# Altium PCB NORA_V0.01.PcbDoc (part 3 of 3)
Units mm, origin at the board's own origin, x right, y up, seen from the top; angles counter-clockwise.
Board outline 161.42 x 170.81 mm, 2 copper layers (Top Layer, Bottom Layer), stack 1.671 mm thick; 329 components, 221 nets, 903 pads, 560 vias.
Unrouted connection lines stored in the file: 1.
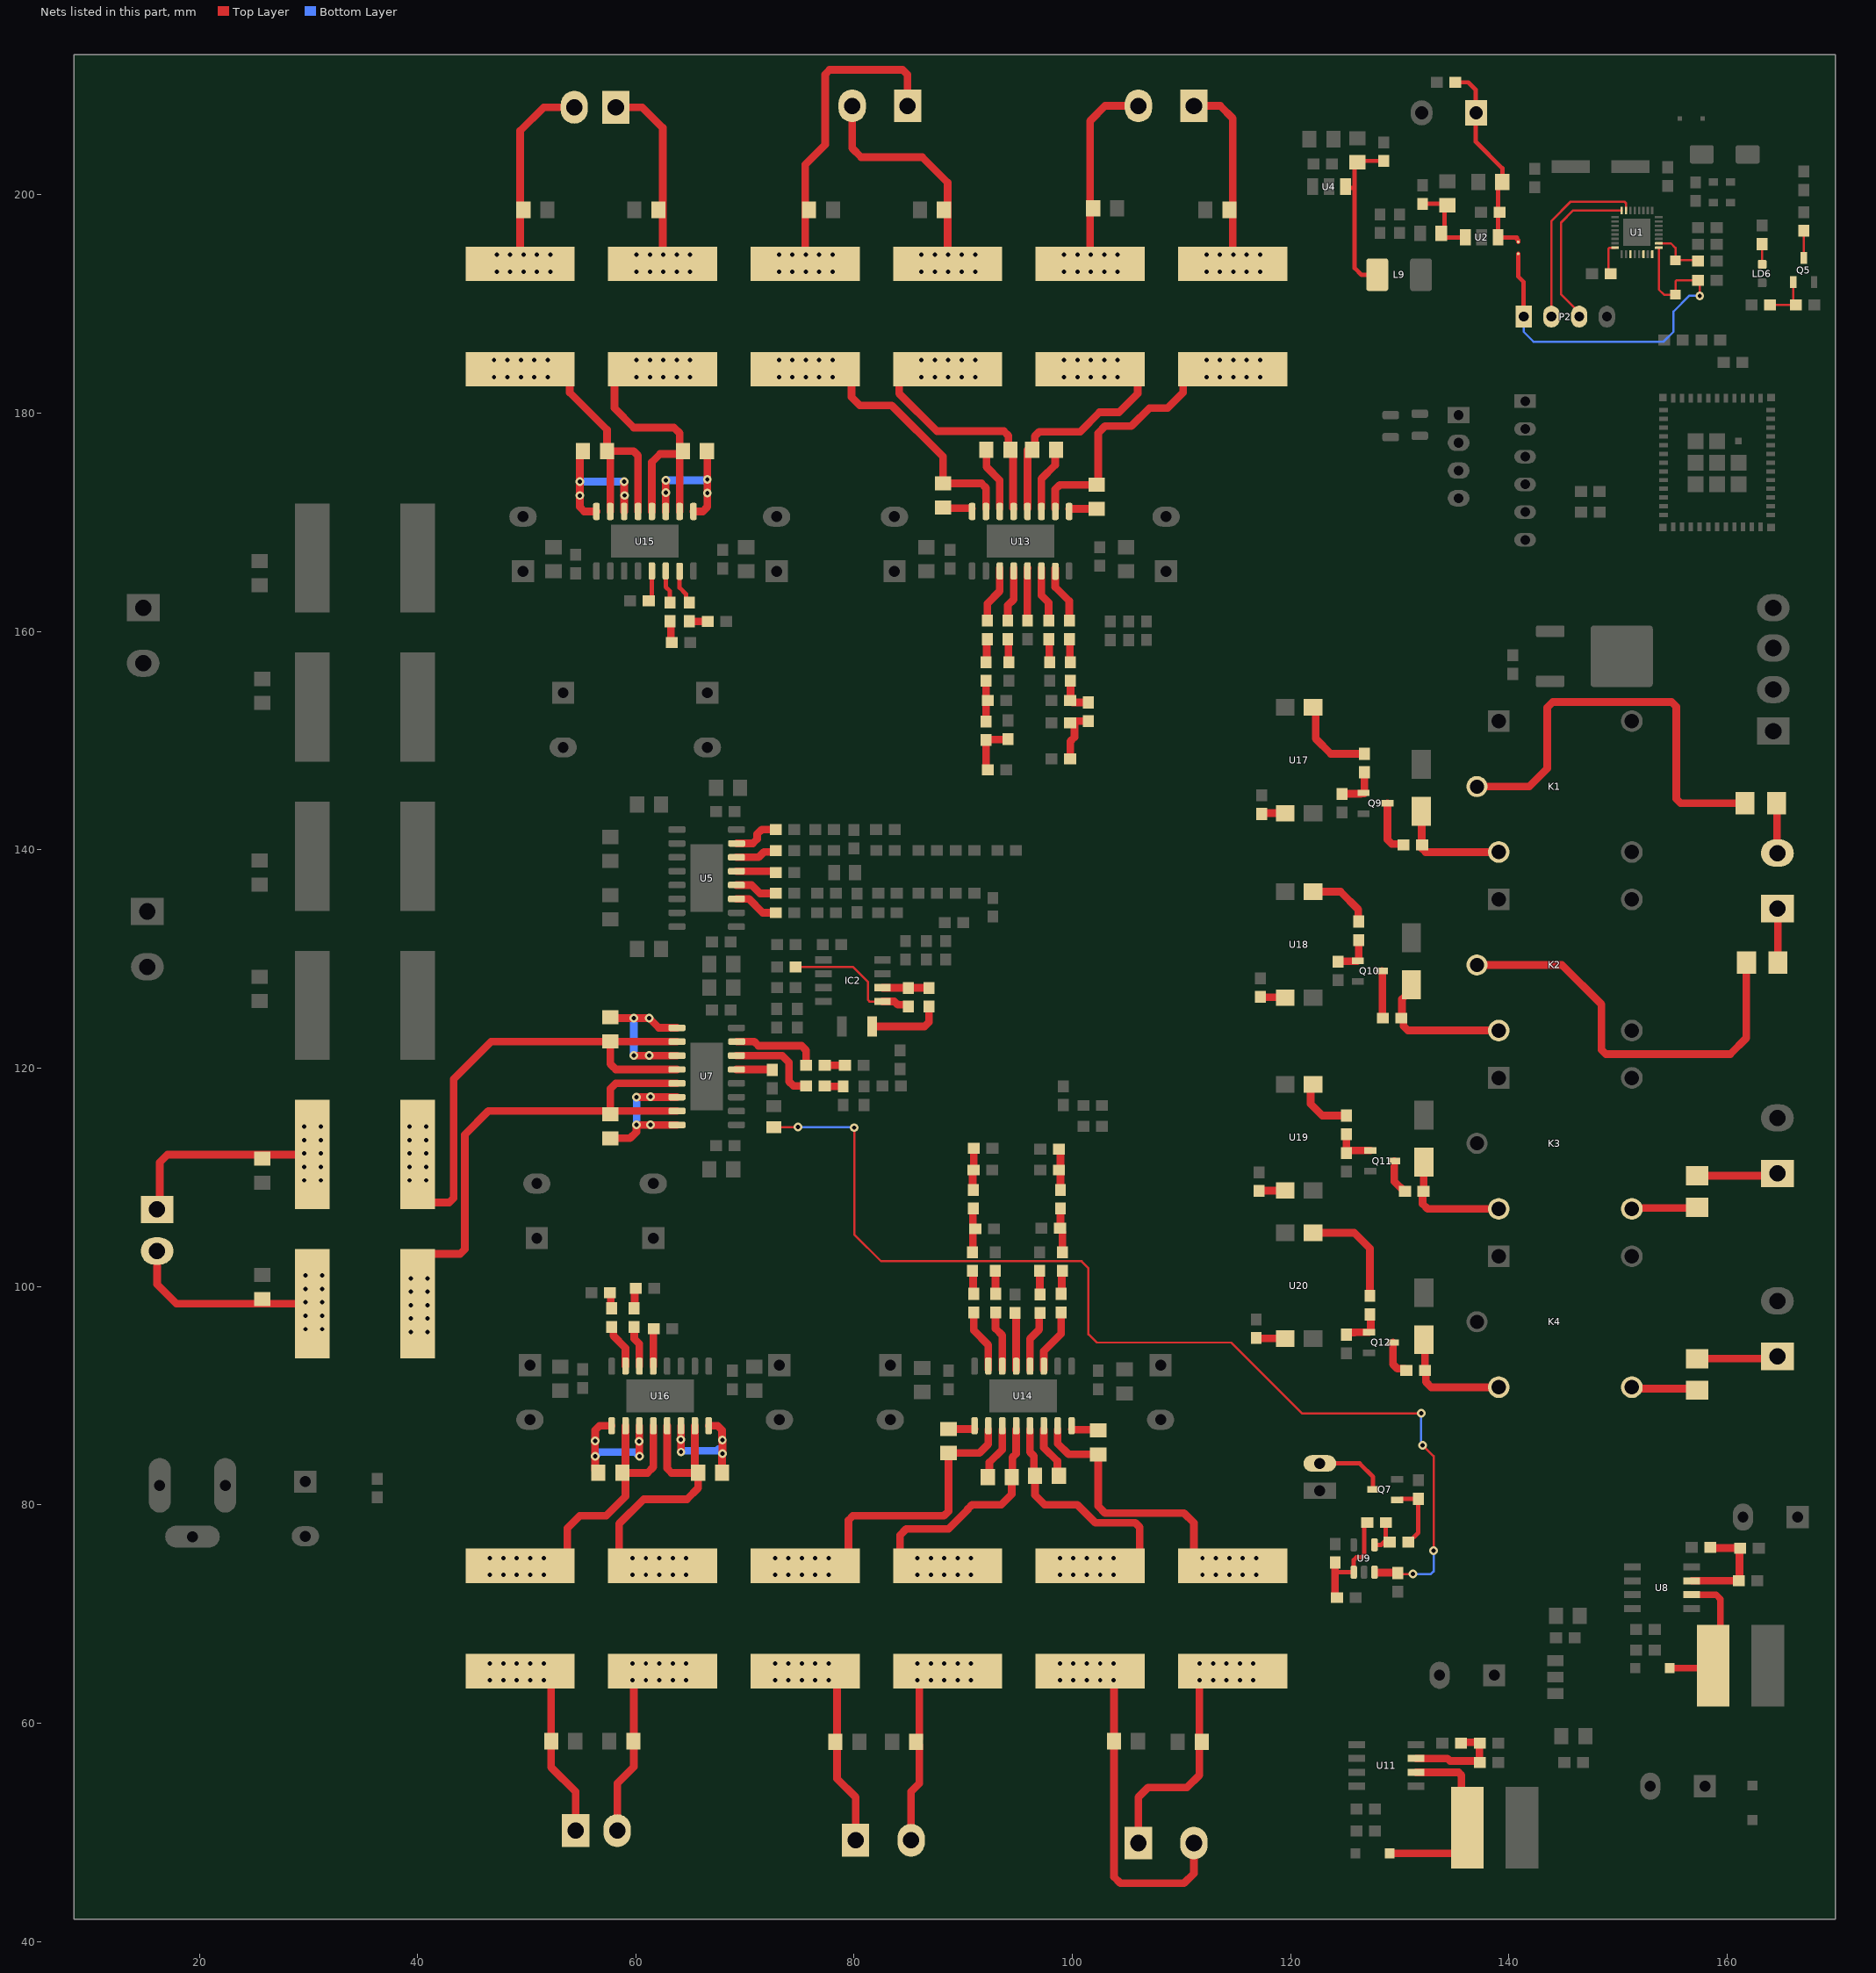
[diagram p3: the nets of this part, all layers, seen from the top]

## Via types
v1: diameter 0.8, hole 0.4, Top Layer to Bottom Layer, 560 vias

## Nets (pads, with @x,y where several pads share a name; then routed paths per layer and width w, separated by ;. In a path a pad name is that pad's centre, name@x,y a point inside that pad or via, vN(x,y) a via of type N, cw(c..) or ccw(c..) an arc to the next point about the centre after c; other vN are vias at no path point) (continued)
NetC38_1: C38.1 L4.2 U7.13 U7.15 | length 48.3
  Top Layer w0.7: L4.2@40.005,98.425 40.005,102.997 43.913,102.997 44.323,103.407 44.323,113.919 46.482,116.078 C38.1@57.658,116.078 ; U7.15@63.765,116.078 C38.1@57.658,116.078 ; U7.13@63.765,118.618 58.166,118.618 57.658,118.11 C38.1@57.658,116.078
  other v1: 39.37,95.841 40.92,95.841 39.37,97.069 40.92,97.069 39.37,98.298 40.92,98.298 39.37,99.527 40.92,99.527 39.37,100.755 40.92,100.755
NetC38_2: C38.2 U7.14 U7.16 | length 13.2
  Top Layer w0.7: C38.2@57.658,113.581 59.468,113.581 60.052,114.165 60.052,114.789 v1(60.071,114.808) U7.16@63.765,114.808 ; v1(60.071,117.348) U7.14@63.765,117.348
  Bottom Layer w0.7: v1(60.071,114.808) v1(60.071,117.348)
  other v1: 61.341,114.808 61.34,117.375
NetC39_1: C39.1 R21.1 | length 1.9
  Top Layer w0.7: R21.1@77.304,120.269 C39.1@79.16,120.269
NetC42_2: C42.2 R14.1 | length 6.8
  Top Layer w0.7: C42.2@81.661,123.825 86.458,123.825 86.868,124.235 R14.1@86.868,125.642
NetC43_1: C43.1 R22.1 | length 1.7
  Top Layer w0.7: R22.1@77.304,118.364 77.323,118.345 78.974,118.345 C43.1@78.994,118.325
NetC45_2: C45.2 U7.5 | length 3.3
  Top Layer w0.7: U7.5@69.215,119.885 72.481,119.885 C45.2@72.517,119.849
NetC47_2: C47.2 L4.1 P5.2 | length 19.4
  Top Layer w0.7: P5.2@16.129,103.251 16.129,100.203 17.907,98.425 L4.1@30.353,98.425 29.718,97.79 v1(29.718,97.323)
  other v1: 29.718,96.095 31.268,96.095 31.268,97.323 29.718,98.552 31.268,98.552 29.718,99.781 31.268,99.781 29.718,101.009 31.268,101.009
NetC48_1: C49.1 L5.1 P5.1 | length 18.7
  Top Layer w0.7: P5.1@16.129,107.061 16.383,107.315 16.383,111.379 17.093,112.089 L5.1@30.353,112.089
  other v1: 29.591,109.728 31.141,109.728 29.591,110.957 31.141,110.957 29.591,112.185 31.141,112.185 29.591,113.414 31.141,113.414 29.591,114.643 31.141,114.643
NetC50_1: C50.1 L5.2 U7.10 U7.12 | length 48.2
  Top Layer w0.7: L5.2@40.005,112.089 40.005,108.844 41.153,107.696 42.897,107.696 43.307,108.106 43.307,119.003 46.736,122.432 57.411,122.432 57.669,122.173 57.669,120.385 57.913,120.141 58.169,119.885 U7.12@63.765,119.885 ; C50.1@57.669,122.432 U7.10@63.765,122.432
  other v1: 39.243,109.728 40.793,109.728 39.243,110.957 40.793,110.957 39.243,112.185 40.793,112.185 39.243,113.414 40.793,113.414 39.243,114.643 40.793,114.643
NetC50_2: C50.2 U7.9 U7.11 | length 13.8
  Top Layer w0.7: C50.2@57.669,124.671 57.753,124.587 v1@59.79,124.587 ; v1(59.817,121.158) U7.11@63.765,121.158 ; v1(59.817,124.587) v1(61.214,124.587) 62.103,123.698 U7.9@63.765,123.698
  Bottom Layer w0.7: v1(59.817,121.158) v1(59.817,124.587)
  other v1: 61.214,121.158
NetC58_2: C58.2 U5.5 | length 3.6
  Top Layer w0.7: U5.5@69.215,138.046 72.686,138.046 C58.2@72.81,137.922
NetC90_2: C90.2 R30.2 R31.1 U8.3 | length 10.1
  Top Layer w0.7: U8.3@156.746,73.044 C90.2@161.058,73.044 161.122,73.108 161.122,75.952 R31.1@161.185,76.016 161.147,76.054 158.478,76.054 R30.2@158.44,76.092
NetC96_2: C96.2 R32.2 R33.1 U11.3 | length 9.4
  Top Layer w0.7: U11.3@131.49,56.769 134.356,56.769 134.591,56.534 137.18,56.534 R33.1@137.326,56.388 137.298,56.416 137.298,58.016 137.326,58.044 C96.2@137.326,58.166 ; R32.2@135.597,58.166 135.67,58.239 C96.2@137.197,58.239
NetC101_2: C101.2 C102.2 L9.2 U4.1 | length 15.5
  Top Layer w0.4: U4.1@125.016,200.759 125.143,200.632 125.857,200.632 ; L9.2@127.936,192.678 126.473,192.678 125.857,193.294 125.857,200.632 ; C102.2@128.524,203.112 126.234,203.112 125.857,202.735 125.857,200.632
NetC104_1: C104.1 L11.2 U13.15 | length 25.2
  Top Layer w0.7: L11.2@75.514,184.023 78.531,184.023 79.756,182.798 79.756,181.483 80.518,180.721 83.439,180.721 88.138,176.022 C104.1@88.138,173.566 91.665,173.566 92.075,173.156 U13.15@92.075,171.254
  other v1: 73.113,183.306 74.342,183.306 75.571,183.306 76.8,183.306 78.028,183.306 73.113,184.856 74.342,184.856 75.571,184.856 76.8,184.856 78.028,184.856
NetC104_2: C104.2 U13.16 | length 2.7
  Top Layer w0.7: C104.2@88.138,171.366 88.194,171.31 90.755,171.31 90.805,171.26 U13.16@90.805,171.254
NetC105_1: C105.1 L13.2 U14.15 | length 26.3
  Top Layer w0.7: U14.15@98.651,86.924 98.651,85.626 99.652,84.625 C105.1@102.362,84.625 102.362,79.883 102.997,79.248 110.236,79.248 111.125,78.359 111.125,75.647 112.35,74.422 L13.2@114.681,74.422
  other v1: 111.913,73.589 113.142,73.589 114.37,73.589 115.599,73.589 116.828,73.589 111.913,75.139 113.142,75.139 114.37,75.139 115.599,75.139 116.828,75.139
NetC105_2: C105.2 U14.16 | length 2.5
  Top Layer w0.7: U14.16@99.921,86.924 99.97,86.874 102.313,86.874 C105.2@102.362,86.825
NetC106_2: C106.2 L11.1 P7.1 | length 28.9
  Top Layer w0.7: L11.1@75.514,193.675 75.514,202.768 77.343,204.597 77.343,211.045 77.753,211.455 84.455,211.455 84.9,211.01 P7.1@84.9,208.153
  other v1: 73.113,192.958 74.342,192.958 75.571,192.958 76.8,192.958 78.028,192.958 73.113,194.508 74.342,194.508 75.571,194.508 76.8,194.508 78.028,194.508
NetC107_2: C107.2 L13.1 P8.1 | length 22.5
  Top Layer w0.7: P8.1@106.045,49.022 106.045,53.213 106.934,54.102 110.49,54.102 111.633,55.245 111.633,63.545 112.858,64.77 L13.1@114.681,64.77
  other v1: 111.659,63.937 112.888,63.937 114.116,63.937 115.345,63.937 116.574,63.937 111.659,65.487 112.888,65.487 114.116,65.487 115.345,65.487 116.574,65.487
NetC108_1: C108.1 C114.2 R60.1 | length 3.7
  Top Layer w0.7: C108.1@92.075,151.755 92.084,151.764 92.084,155.478 C114.2@92.093,155.487
NetC108_2: C108.2 R56.2 R66.1 | length 4.9
  Top Layer w0.7: R66.1@92.241,147.32 92.225,147.32 92.075,147.47 C108.2@92.075,150.055 92.124,150.104 94.058,150.104 R56.2@94.107,150.153
NetC109_1: C109.1 L14.2 U13.13 | length 24.5
  Top Layer w0.7: L14.2@88.57,184.023 85.355,184.023 84.13,182.798 84.13,181.808 87.58,178.358 93.717,178.358 94.127,177.948 94.127,177.056 94.526,176.657 94.565,176.657 94.565,171.304 U13.13@94.615,171.254
  other v1: 86.169,183.306 87.398,183.306 88.627,183.306 89.855,183.306 91.084,183.306 86.169,184.856 87.398,184.856 88.627,184.856 89.855,184.856 91.084,184.856
NetC109_2: C109.2 U13.14 | length 5.9
  Top Layer w0.7: C109.2@92.118,176.657 92.118,175.09 93.345,173.863 U13.14@93.345,171.254
NetC110_1: C116.1 L14.1 P7.2 | length 21.4
  Top Layer w0.7: P7.2@79.819,208.153 79.819,204.279 80.645,203.454 86.233,203.454 88.57,201.117 L14.1@88.57,193.675
  other v1: 86.169,192.958 87.398,192.958 88.627,192.958 89.855,192.958 91.084,192.958 86.169,194.508 87.398,194.508 88.627,194.508 89.855,194.508 91.084,194.508
NetC111_1: C111.1 C115.2 R64.1 | length 3.9
  Top Layer w0.7: R64.1@98.905,105.162 99.082,104.985 C115.2@99.082,103.141 ; R64.1@98.905,105.378 C111.1@98.905,107.156
NetC111_2: C111.2 R58.2 R69.1 | length 3.8
  Top Layer w0.7: R69.1@98.739,112.578 98.755,112.578 98.905,112.428 C111.2@98.905,108.856
NetC112_1: C112.1 L15.2 U14.13 | length 24.4
  Top Layer w0.7: U14.13@96.111,86.924 96.111,84.826 96.461,84.476 96.461,82.779 C112.1@96.563,82.677 96.563,80.899 97.452,80.01 100.457,80.01 102.108,78.359 105.762,78.359 106.172,77.949 106.172,75.647 104.947,74.422 L15.2@101.625,74.422
  other v1: 98.857,73.589 100.086,73.589 101.315,73.589 102.543,73.589 103.772,73.589 98.857,75.139 100.086,75.139 101.315,75.139 102.543,75.139 103.772,75.139
NetC112_2: C112.2 U14.14 | length 4.8
  Top Layer w0.7: U14.14@97.381,86.924 97.381,85.245 98.615,84.011 98.615,82.825 C112.2@98.763,82.677
NetC113_1: C117.1 L15.1 P8.2 | length 31
  Top Layer w0.7: L15.1@101.625,64.77 102.577,64.77 103.802,63.545 C117.1@103.802,58.349 103.802,45.931 104.394,45.339 110.236,45.339 111.125,46.228 P8.2@111.125,49.022
  other v1: 98.857,63.937 100.086,63.937 101.315,63.937 102.543,63.937 103.772,63.937 98.857,65.487 100.086,65.487 101.315,65.487 102.543,65.487 103.772,65.487
NetC114_1: C114.1 R70.1 | length 2.2
  Top Layer w0.7: C114.1@92.093,157.187 92.148,157.241 92.148,159.243 R70.1@92.202,159.297
NetC115_1: C115.1 R71.1 | length 2.2
  Top Layer w0.7: R71.1@98.973,99.326 99.027,99.381 99.027,101.387 C115.1@99.082,101.441
NetC118_1: C118.1 R72.1 | length 2.2
  Top Layer w0.7: R72.1@94.075,159.297 94.13,159.243 94.13,157.241 C118.1@94.184,157.187
NetC119_1: C119.1 R73.1 | length 2.2
  Top Layer w0.7: C119.1@97,101.441 97.014,101.427 97.014,99.289 R73.1@97.028,99.275
NetC120_2: C120.2 U13.5 | length 4.8
  Top Layer w0.7: U13.5@95.882,165.804 95.861,165.783 95.861,161.021 C120.2@95.885,160.997
NetC121_2: C121.2 U14.5 | length 5.2
  Top Layer w0.7: C121.2@94.742,97.575 94.845,97.472 94.845,92.375 U14.5@94.844,92.374
NetC122_1: C122.1 L16.2 U13.12 | length 23.7
  Top Layer w0.7: U13.12@95.882,171.254 C122.1@95.882,176.657 ; C122.1@96.309,176.657 96.55,176.898 96.55,177.898 96.96,178.308 100.711,178.308 102.489,180.086 104.267,180.086 105.989,181.808 105.989,182.945 104.911,184.023 L16.2@101.625,184.023
  other v1: 99.225,183.306 100.453,183.306 101.682,183.306 102.911,183.306 104.14,183.306 99.225,184.856 100.453,184.856 101.682,184.856 102.911,184.856 104.14,184.856
NetC122_2: C122.2 U13.11 | length 6
  Top Layer w0.7: U13.11@97.155,171.254 97.155,173.99 98.425,175.26 98.425,176.573 C122.2@98.509,176.657
NetC123_2: C123.2 L16.1 P9.2 | length 18.1
  Top Layer w0.7: L16.1@101.625,193.675 101.625,206.781 102.997,208.153 P9.2@106.045,208.153
  other v1: 99.225,192.958 100.453,192.958 101.682,192.958 102.911,192.958 104.14,192.958 99.225,194.508 100.453,194.508 101.682,194.508 102.911,194.508 104.14,194.508
NetC124_1: C124.1 L17.2 U14.12 | length 24.4
  Top Layer w0.7: L17.2@88.57,74.422 85.426,74.422 84.201,75.647 84.201,77.216 84.772,77.787 88.646,77.787 90.424,79.565 90.424,79.629 90.805,80.01 93.472,80.01 94.445,80.983 C124.1@94.445,82.55 94.494,82.599 94.494,84.349 94.844,84.699 U14.12@94.844,86.924
  other v1: 85.802,73.589 87.03,73.589 88.259,73.589 89.488,73.589 90.717,73.589 85.802,75.139 87.03,75.139 88.259,75.139 89.488,75.139 90.717,75.139
NetC124_2: C124.2 U14.11 | length 4.9
  Top Layer w0.7: C124.2@92.245,82.55 92.393,82.698 92.393,83.884 93.571,85.062 U14.11@93.571,86.924
NetC125_2: C125.2 L17.1 P10.2 | length 17.5
  Top Layer w0.7: P10.2@85.217,49.276 85.217,53.721 85.98,54.484 85.98,57.995 C125.2@85.682,58.293 ; C125.2@85.98,58.591 85.98,63.545 87.204,64.77 L17.1@88.57,64.77
  other v1: 85.802,63.937 87.03,63.937 88.259,63.937 89.488,63.937 90.717,63.937 85.802,65.487 87.03,65.487 88.259,65.487 89.488,65.487 90.717,65.487
NetC126_1: C126.1 R74.1 | length 2.1
  Top Layer w0.7: R74.1@97.822,159.297 97.869,159.25 97.869,157.235 C126.1@97.917,157.187
NetC127_1: C127.1 R75.1 | length 2.1
  Top Layer w0.7: C127.1@92.936,101.441 92.945,101.432 92.945,99.335 R75.1@92.954,99.326
NetC128_1: C128.1 C132.1 R81.1 | length 3.5
  Top Layer w0.7: C132.1@99.822,155.487 99.822,153.67 99.833,153.67 99.999,153.504 C128.1@101.473,153.504
NetC128_2: C128.2 R76.1 R80.1 | length 5.4
  Top Layer w0.7: R76.1@99.783,148.336 99.783,148.466 99.802,148.486 99.802,149.955 100.183,150.335 100.183,151.521 R80.1@100.183,151.804 ; R80.1@99.783,151.638 99.933,151.788 100.167,151.788 R80.1@100.183,151.804 ; C128.2@101.473,151.804 R80.1@100.183,151.804
NetC129_1: C134.1 L18.1 P9.1 | length 17.4
  Top Layer w0.7: P9.1@111.125,208.153 113.538,208.153 114.681,207.01 L18.1@114.681,193.675
  other v1: 112.28,192.958 113.509,192.958 114.738,192.958 115.966,192.958 117.195,192.958 112.28,194.508 113.509,194.508 114.738,194.508 115.966,194.508 117.195,194.508
NetC130_1: C130.1 C133.1 R83.1 | length 4.3
  Top Layer w0.7: C133.1@90.845,103.141 90.874,103.17 R83.1@90.874,105.457 ; C130.1@90.904,107.156 90.904,106.985 90.874,106.956 R83.1@90.874,105.457 ; R83.1@91.098,105.283 91.048,105.283 R83.1@90.874,105.457
NetC130_2: C130.2 R77.1 R82.1 | length 3.9
  Top Layer w0.7: C130.2@90.904,108.856 90.86,108.9 90.86,110.673 90.957,110.77 90.957,112.635 R77.1@90.971,112.649
NetC131_1: C135.1 L19.1 P10.1 | length 18.5
  Top Layer w0.7: L19.1@75.514,64.77 77.208,64.77 78.433,63.545 78.433,58.451 C135.1@78.275,58.293 78.433,58.135 78.433,54.917 80.137,53.213 P10.1@80.137,49.276
  other v1: 72.746,63.937 73.975,63.937 75.203,63.937 76.432,63.937 77.661,63.937 72.746,65.487 73.975,65.487 75.203,65.487 76.432,65.487 77.661,65.487
NetC132_2: C132.2 R78.1 | length 2.2
  Top Layer w0.7: R78.1@99.713,159.297 99.768,159.243 99.768,157.241 C132.2@99.822,157.187
NetC133_2: C133.2 R79.1 | length 2.2
  Top Layer w0.7: C133.2@90.845,101.441 90.899,101.387 90.899,99.381 R79.1@90.954,99.326
NetC136_1: C136.1 L18.2 U13.10 | length 25.8
  Top Layer w0.7: U13.10@98.429,171.254 98.429,173.029 98.839,173.439 C136.1@102.235,173.439 102.363,173.567 102.363,178.182 102.997,178.816 105.41,178.816 107.061,180.467 108.712,180.467 110.145,181.9 110.145,182.798 111.369,184.023 L18.2@114.681,184.023
  other v1: 112.28,183.306 113.509,183.306 114.738,183.306 115.966,183.306 117.195,183.306 112.28,184.856 113.509,184.856 114.738,184.856 115.966,184.856 117.195,184.856
NetC136_2: C136.2 U13.9 | length 2.5
  Top Layer w0.7: U13.9@99.695,171.254 99.703,171.247 102.227,171.247 C136.2@102.235,171.239
NetC137_1: C137.1 L19.2 U14.10 | length 27.6
  Top Layer w0.7: L19.2@75.514,74.422 78.248,74.422 79.473,75.647 79.473,78.584 79.883,78.994 88.236,78.994 88.646,79.404 C137.1@88.646,84.752 91.483,84.752 92.297,85.566 U14.10@92.297,86.924
  other v1: 72.746,73.589 73.975,73.589 75.203,73.589 76.432,73.589 77.661,73.589 72.746,75.139 73.975,75.139 75.203,75.139 76.432,75.139 77.661,75.139
NetC137_2: C137.2 U14.9 | length 2.4
  Top Layer w0.7: C137.2@88.646,86.952 88.66,86.938 91.017,86.938 U14.9@91.031,86.924
NetC151_1: C151.1 L20.2 U15.13 U15.15 | length 26.2
  Top Layer w0.7: L20.2@49.403,184.023 52.715,184.023 53.939,182.798 53.939,181.9 57.361,178.478 C151.1@57.361,176.53 59.788,176.53 60.198,176.12 U15.13@60.198,171 ; U15.15@57.658,171 C151.1@57.658,176.36
  other v1: 47.002,183.306 48.231,183.306 49.46,183.306 50.688,183.306 51.917,183.306 47.002,184.856 48.231,184.856 49.46,184.856 50.688,184.856 51.917,184.856
NetC151_2: C151.2 U15.14 U15.16 | length 13.9
  Top Layer w0.7: C151.2@55.161,176.657 54.864,176.36 54.864,171.41 55.274,171 U15.16@56.388,171 ; U15.14@58.928,171 v1(58.928,173.736)
  Bottom Layer w0.7: v1(54.864,173.736) v1(58.928,173.736)
  other v1: 54.864,172.466 58.955,172.467
NetC152_1: C152.1 L21.2 U16.13 U16.15 | length 28.5
  Top Layer w0.7: L21.2@62.459,74.422 59.681,74.422 58.456,75.647 58.456,78.268 60.706,80.518 64.686,80.518 65.702,81.534 C152.1@65.702,82.931 ; U16.13@62.865,87.249 62.865,83.341 63.275,82.931 C152.1@65.702,82.931 ; U16.15@65.405,87.249 65.405,83.228 C152.1@65.702,82.931
  other v1: 59.69,73.589 60.919,73.589 62.148,73.589 63.377,73.589 64.605,73.589 59.69,75.139 60.919,75.139 62.148,75.139 63.377,75.139 64.605,75.139
NetC152_2: C152.2 U16.14 U16.16 | length 11.8
  Top Layer w0.7: v1(64.135,84.836) U16.14@64.135,87.249 ; U16.16@66.675,87.249 67.492,87.249 67.902,86.839 67.902,85.938 67.931,85.908 67.931,84.723 v1(67.945,84.709) 67.945,84.682 67.902,84.639 C152.2@67.902,82.931
  Bottom Layer w0.7: v1(64.135,84.836) 64.262,84.963 67.437,84.963 67.564,85.09 v1(67.945,84.709)
  other v1: 67.918,85.938 64.108,85.978
NetC153_2: C153.2 L20.1 P11.2 | length 18
  Top Layer w0.7: L20.1@49.403,193.675 49.403,205.867 51.562,208.026 P11.2@54.356,208.026
  other v1: 47.256,192.958 48.485,192.958 49.714,192.958 50.942,192.958 52.171,192.958 47.256,194.508 48.485,194.508 49.714,194.508 50.942,194.508 52.171,194.508
NetC154_2: C154.2 L21.1 P12.2 | length 17.2
  Top Layer w0.7: P12.2@58.293,50.165 58.293,54.483 59.817,56.007 59.817,63.545 61.042,64.77 L21.1@62.459,64.77
  other v1: 59.69,63.937 60.919,63.937 62.148,63.937 63.377,63.937 64.605,63.937 59.69,65.487 60.919,65.487 62.148,65.487 63.377,65.487 64.605,65.487
NetC155_2: C155.2 U15.5 | length 2.9
  Top Layer w0.4: C155.2@61.175,162.814 61.465,163.104 U15.5@61.465,165.55
NetC156_1: C159.1 L22.1 P11.1 | length 17.9
  Top Layer w0.7: P11.1@58.166,208.026 60.579,208.026 62.459,206.146 C159.1@62.459,198.628 ; C159.1@62.06,198.628 C159.1@62.459,198.628 ; L22.1@62.459,193.675 C159.1@62.459,198.628
  other v1: 60.058,192.958 61.287,192.958 62.515,192.958 63.744,192.958 64.973,192.958 60.058,194.508 61.287,194.508 62.515,194.508 63.744,194.508 64.973,194.508
NetC157_2: C157.2 U16.5 | length 3.4
  Top Layer w0.7: U16.5@61.598,92.699 C157.2@61.598,96.103
NetC158_1: C160.1 L23.1 P12.1 | length 17.7
  Top Layer w0.7: L23.1@49.403,64.77 51.015,64.77 52.24,63.545 C160.1@52.24,58.349 52.24,55.964 54.483,53.721 P12.1@54.483,50.165
  other v1: 46.635,63.937 47.864,63.937 49.092,63.937 50.321,63.937 51.55,63.937 46.635,65.487 47.864,65.487 49.092,65.487 50.321,65.487 51.55,65.487
NetC161_1: C161.1 R84.1 | length 2
  Top Layer w0.7: R84.1@63.119,160.948 63.202,160.865 63.202,159.087 C161.1@63.285,159.004
NetC162_1: C162.1 R85.1 | length 1.9
  Top Layer w0.7: R85.1@59.817,98.005 59.9,98.088 59.9,99.739 C162.1@59.983,99.822
NetC163_1: C163.1 R86.1 | length 1.7
  Top Layer w0.7: R86.1@64.897,160.948 64.917,160.929 66.567,160.929 C163.1@66.587,160.909
NetC164_1: C164.1 R87.1 | length 1.5
  Top Layer w0.7: C164.1@57.619,99.441 57.702,99.358 57.702,98.088 R87.1@57.785,98.005
NetC165_1: C165.1 L22.2 U15.10 U15.12 | length 28.6
  Top Layer w0.7: U15.12@61.465,171 61.465,175.511 62.23,176.276 64.051,176.276 C165.1@64.305,176.53 64.007,176.828 64.007,178.182 63.5,178.689 59.817,178.689 58.039,180.467 58.039,182.798 59.264,184.023 L22.2@62.459,184.023 ; U15.10@64.012,171 C165.1@64.012,175.833
  other v1: 60.058,183.306 61.287,183.306 62.515,183.306 63.744,183.306 64.973,183.306 60.058,184.856 61.287,184.856 62.515,184.856 63.744,184.856 64.973,184.856
NetC165_2: C165.2 U15.9 U15.11 | length 13.3
  Top Layer w0.7: U15.11@62.738,171 v1(62.738,173.863) ; U15.9@65.278,171 66.138,171 66.548,171.41 v1(66.548,173.949) 66.548,176.487 C165.2@66.505,176.53
  Bottom Layer w0.7: v1(62.738,173.863) 66.435,173.863 66.521,173.949 v1(66.548,173.949)
  other v1: 66.548,172.679 62.738,172.72
NetC166_1: C166.1 L23.2 U16.10 U16.12 | length 26.6
  Top Layer w0.7: L23.2@49.403,74.422 52.496,74.422 53.721,75.647 53.721,77.851 54.864,78.994 57.277,78.994 59.055,80.772 C166.1@59.055,82.931 ; U16.10@59.051,87.249 59.051,82.935 C166.1@59.056,82.931 ; U16.12@61.598,87.249 61.598,83.468 61.061,82.931 C166.1@59.056,82.931
  other v1: 46.635,73.589 47.864,73.589 49.092,73.589 50.321,73.589 51.55,73.589 46.635,75.139 47.864,75.139 49.092,75.139 50.321,75.139 51.55,75.139
NetC166_2: C166.2 U16.9 U16.11 | length 12.9
  Top Layer w0.7: C166.2@56.558,82.931 56.28,83.209 56.28,84.436 v1(56.261,84.455) v1(56.261,85.852) 56.273,85.864 56.273,86.839 56.683,87.249 U16.9@57.785,87.249 ; v1(60.325,84.455) U16.11@60.325,87.249
  Bottom Layer w0.7: v1(56.261,84.455) 56.642,84.836 59.944,84.836 v1(60.325,84.455)
  other v1: 60.298,85.811
NetD2_1: D2.1 L8.2 U8.2 | length 13.3
  Top Layer w0.6: D2.1@154.72,65.043 158.468,65.043 L8.2@158.703,65.278 159.385,65.96 159.385,71.374 158.985,71.774 U8.2@156.746,71.774
NetD4_1: D4.1 L10.2 U11.2 | length 18.1
  Top Layer w0.7: D4.1@129.073,48.082 135.034,48.082 136.184,49.232 L10.2@136.184,50.419 135.635,50.968 135.635,55.246 135.382,55.499 U11.2@131.49,55.499
NetD5_A: D5.A K1.A2 R88.2 | length 10.4
  Top Layer w0.7: R88.2@131.953,140.209 132.363,139.799 K1.A2@139.061,139.799 ; D5.A@131.953,143.519 131.997,143.475 131.997,140.506 R88.2@132.041,140.462
NetD6_A: D6.A K2.A2 R92.2 | length 13.2
  Top Layer w0.7: D6.A@131.064,127.644 131.064,127.194 130.186,126.316 R92.2@130.186,124.587 ; K2.A2@139.061,123.457 130.746,123.457 130.336,123.867 130.336,124.437 R92.2@130.186,124.587 ; R92.2@130.186,124.587 R92.2@130.136,124.587 R92.2@130.186,124.587
NetD7_A: D7.A K3.A2 R96.2 | length 10.9
  Top Layer w0.7: D7.A@132.188,111.28 132.188,108.731 132.077,108.621 132.077,107.572 132.533,107.116 K3.A2@139.061,107.116
NetD8_A: D8.A K4.A2 R100.2 | length 10.8
  Top Layer w0.7: D8.A@132.207,95.132 132.311,95.028 R100.2@132.311,92.329 ; R100.2@132.295,92.329 132.374,92.25 132.374,91.273 132.873,90.774 K4.A2@139.061,90.774
NetIC2_1: IC2.1 R10.2 R17.1 | length 12.8
  Top Layer w0.2: R10.2@74.637,129.286 75.565,129.286 79.883,129.286 81.28,127.889 81.28,126.238 81.407,126.111 IC2.1@82.595,126.111
  Top Layer w0.7: IC2.1@82.595,126.111 83.693,126.111 83.995,125.809 84.813,125.809 84.963,125.659 R17.1@84.963,125.642
NetIC2_2: IC2.2 R14.2 R17.2 | length 4.3
  Top Layer w0.7: IC2.2@82.595,127.381 82.614,127.362 86.849,127.362 R14.2@86.868,127.342
NetJ7_1: J7.1 L25.1 | length 5
  Top Layer w0.7: J7.1@164.592,134.62 164.64,134.572 L25.1@164.64,129.667
NetJ7_2: J7.2 L24.1 | length 4.6
  Top Layer w0.7: L24.1@164.513,144.272 164.553,144.233 164.553,139.739 J7.2@164.592,139.7
NetJ8_1: J8.1 L26.1 | length 7.5
  Top Layer w0.7: L26.1@157.226,110.157 164.386,110.157 J8.1@164.592,110.363
NetJ9_1: J9.1 L27.1 | length 7.5
  Top Layer w0.7: L27.1@157.226,93.393 164.386,93.393 J9.1@164.592,93.599
NetK1_COM: K1.COM L24.2 | length 39.8
  Top Layer w0.7: K1.COM@137.061,145.799 141.862,145.799 143.51,147.447 143.51,153.035 144.018,153.543 154.911,153.543 155.321,153.133 155.321,144.682 155.731,144.272 L24.2@161.623,144.272
NetK2_COM: K2.COM L25.2 | length 38
  Top Layer w0.7: K2.COM@137.061,129.457 144.863,129.457 148.463,125.857 148.463,121.695 148.873,121.285 160.274,121.285 161.75,122.761 L25.2@161.75,129.667
NetK3_NO: K3.NO L26.2 | length 6
  Top Layer w0.7: K3.NO@151.261,107.116 151.337,107.191 157.15,107.191 L26.2@157.226,107.267
NetK4_NO: K4.NO L27.2 | length 6.1
  Top Layer w0.7: K4.NO@151.261,90.774 151.397,90.638 157.09,90.638 L27.2@157.226,90.503
NetLD6_2: LD6.2 R65.2 | length 1.9
  Top Layer w0.2: LD6.2@163.195,193.636 R65.2@163.195,195.492
NetQ5_1: Q5.1 R40.1 R46.1 | length 4.5
  Top Layer w0.2: R40.1@163.918,189.938 R46.1@166.282,189.938 166.055,190.165 Q5.1@166.055,192.013
NetQ5_3: Q5.3 R37.1 | length 2.5
  Top Layer w0.2: Q5.3@167.005,194.213 R37.1@167.005,196.708
NetQ7_1: Q7.1 R20.2 R63.1 | length 6.4
  Top Layer w0.4: Q7.1@129.751,80.457 130.001,80.457 130.101,80.557 130.335,80.557 R63.1@131.699,80.557 131.682,80.54 131.682,77.442 130.821,76.581 R20.2@130.771,76.581
NetQ7_3: Q7.3 U6.2 | length 6.6
  Top Layer w0.4: U6.2@122.665,83.799 126.313,83.799 127.551,82.561 Q7.3@127.551,81.407
NetQ9_1: Q9.1 R90.2 R91.2 | length 6
  Top Layer w0.7: R91.2@124.691,145.099 124.764,145.172 Q9.1@126.612,145.172 ; R91.2@124.714,145.172 R91.2@124.714,145.122 126.412,145.122 126.462,145.172 Q9.1@126.612,145.172 ; Q9.1@126.746,145.161 R90.2@126.746,147.105 ; Q9.1@126.612,145.172 Q9.1@126.662,145.222 Q9.1@126.612,145.172
NetQ9_3: Q9.3 R88.1 | length 5
  Top Layer w0.7: Q9.3@128.862,144.272 128.862,140.938 129.272,140.528 130.275,140.528 R88.1@130.341,140.462
NetQ10_1: Q10.1 R94.2 R95.2 | length 3.9
  Top Layer w0.7: R95.2@124.333,129.755 124.333,129.805 Q10.1@126.104,129.805 ; Q10.1@126.154,129.855 Q10.1@126.104,129.805 ; R94.2@126.238,131.738 126.238,129.905 126.204,129.905 Q10.1@126.104,129.805
NetQ10_3: Q10.3 R92.1 | length 4.4
  Top Layer w0.7: Q10.3@128.354,128.905 128.404,128.855 128.404,124.619 R92.1@128.436,124.587
NetQ11_1: Q11.1 R98.2 R99.2 | length 4.1
  Top Layer w0.7: R98.2@125.095,113.958 R99.2@125.095,112.229 125.095,112.279 125.272,112.456 Q11.1@127.297,112.456
NetQ11_3: Q11.3 R96.1 | length 3.2
  Top Layer w0.7: Q11.3@129.497,111.506 129.497,109.633 130.418,108.712 R96.1@130.468,108.712
NetQ12_1: Q12.1 R102.2 R103.2 | length 4.3
  Top Layer w0.7: R103.2@125.095,95.592 125.095,95.642 125.245,95.792 125.852,95.792 ; R103.2@125.57,95.819 Q12.1@127.17,95.819 127.22,95.869 127.338,95.869 127.338,97.278 127.254,97.362 R102.2@127.254,97.448
NetQ12_3: Q12.3 R100.1 | length 3.4
  Top Layer w0.7: Q12.3@129.37,94.869 129.37,92.889 129.78,92.479 130.445,92.479 R100.1@130.595,92.329
NetR16_1: R16.1 R51.2 R67.1 U9.1 | length 10.3
  Top Layer w0.4: 124.062,73.787 124.105,73.83 U9.1@125.777,73.83 125.777,74.95 126.011,75.184 126.492,75.184 126.746,75.438 126.746,78.102 R67.1@127.022,78.378
  Top Layer w0.7: R51.2@124.079,71.501 124.062,71.518 124.062,73.787 124.062,74.515 124.079,74.532 R16.1@124.079,74.715
NetR20_1: R20.1 R67.2 U9.4 | length 3.3
  Top Layer w0.4: U9.4@127.677,76.34 128.29,76.34 R20.1@128.722,76.773 ; R67.2@128.722,78.378 R20.1@128.722,76.773 ; R20.1@129.071,76.581 128.879,76.773 R20.1@128.722,76.773
NetR21_2: R21.2 U7.7 | length 8.1
  Top Layer w0.7: U7.7@69.236,122.432 70.861,122.432 71.24,122.052 75.194,122.052 75.604,121.642 R21.2@75.604,120.269
NetR22_2: R22.2 U7.6 | length 8.6
  Top Layer w0.7: U7.6@69.215,121.158 73.406,121.158 74.041,120.523 74.041,118.774 74.451,118.364 R22.2@75.604,118.364
NetR53_2: R53.2 U5.7 | length 4.3
  Top Layer w0.7: U5.7@69.236,140.593 70.71,140.593 71.12,141.003 71.12,141.449 71.53,141.859 72.732,141.859 R53.2@72.737,141.854
NetR54_2: R54.2 U5.6 | length 3.8
  Top Layer w0.7: U5.6@69.215,139.319 71.247,139.319 71.74,139.812 72.6,139.812 R54.2@72.737,139.949
NetR59_2: R59.2 U5.3 | length 4.1
  Top Layer w0.7: U5.3@69.215,135.509 70.358,135.509 71.628,134.239 R59.2@72.81,134.239
NetR61_2: R61.2 U5.4 | length 3.9
  Top Layer w0.7: U5.4@69.215,136.779 70.612,136.779 71.374,136.017 R61.2@72.81,136.017
NetR62_1: R62.1 R68.2 U9.3 | length 99.9
  Top Layer w0.2: R68.2@72.644,114.608 v1(74.857,114.608) ; v1(80.01,114.554) 80.01,104.775 82.474,102.311 100.838,102.311 101.473,101.676 101.473,95.631 102.235,94.869 114.554,94.869 121.031,88.392 v1(131.953,88.392) ; R62.1@129.753,73.789 R62.1@129.794,73.748 129.882,73.66 v1(131.191,73.66) ; v1(132.08,85.471) 133.096,84.455 v1(133.096,75.819)
  Top Layer w0.7: U9.3@127.718,73.789 R62.1@129.753,73.789
  Bottom Layer w0.2: v1(74.857,114.608) 74.883,114.581 79.983,114.581 v1(80.01,114.554) ; v1(131.191,73.66) 132.842,73.66 133.096,73.914 v1(133.096,75.819) ; v1(131.953,88.392) 131.953,85.598 v1(132.08,85.471)
NetR70_2: R70.2 U13.3 | length 5.3
  Top Layer w0.7: R70.2@92.202,160.997 92.202,162.56 93.345,163.703 U13.3@93.345,165.804
NetR71_2: R71.2 U14.3 | length 5.9
  Top Layer w0.7: U14.3@97.381,92.374 97.381,94.079 98.973,95.671 R71.2@98.973,97.626
NetR72_2: R72.2 U13.4 | length 5
  Top Layer w0.7: R72.2@94.075,160.997 94.075,162.401 94.615,162.941 U13.4@94.615,165.804
NetR73_2: R73.2 U14.4 | length 5.6
  Top Layer w0.7: U14.4@96.111,92.374 96.111,95.222 96.955,96.066 96.955,97.502 R73.2@97.028,97.575
NetR74_2: R74.2 U13.6 | length 5.1
  Top Layer w0.7: U13.6@97.155,165.804 97.155,163.322 97.822,162.655 R74.2@97.822,160.997
NetR75_2: R75.2 U14.6 | length 5.5
  Top Layer w0.7: R75.2@92.954,97.626 92.954,96.149 93.571,95.532 U14.6@93.571,92.374
NetR78_2: R78.2 U13.7 | length 5.3
  Top Layer w0.7: U13.7@98.429,165.783 98.429,164.08 99.713,162.796 R78.2@99.713,160.997
NetR79_2: R79.2 U14.7 | length 5.8
  Top Layer w0.7: R79.2@90.954,97.626 90.954,95.99 92.297,94.647 U14.7@92.297,92.395
NetR84_2: R84.2 U15.6 | length 3.1
  Top Layer w0.4: U15.6@62.738,165.55 62.738,164.084 63.119,163.703 R84.2@63.119,162.648
NetR85_2: R85.2 U16.6 | length 3.8
  Top Layer w0.7: R85.2@59.817,96.305 59.857,96.265 59.857,95.21 60.325,94.742 U16.6@60.325,92.699
NetR86_2: R86.2 U15.7 | length 3.1
  Top Layer w0.4: U15.7@64.012,165.529 64.012,164.011 64.597,163.425 64.597,162.998 64.797,162.798 R86.2@64.824,162.798
NetR87_2: R87.2 U16.7 | length 4.1
  Top Layer w0.7: R87.2@57.785,96.305 57.935,96.155 57.935,95.481 59.051,94.365 U16.7@59.051,92.72
NetR89_2: R89.2 U17.1 | length 2.2
  Top Layer w0.7: R89.2@117.348,143.295 117.386,143.256 117.501,143.371 119.495,143.371 U17.1@119.507,143.359
NetR90_1: R90.1 U17.3 | length 8
  Top Layer w0.7: U17.3@122.047,153.059 122.301,152.805 122.301,150.179 123.675,148.805 R90.1@126.746,148.805
NetR93_2: R93.2 U18.1 | length 2.2
  Top Layer w0.7: R93.2@117.221,126.531 117.252,126.499 119.349,126.499 U18.1@119.38,126.468
NetR94_1: R94.1 U18.3 | length 6.1
  Top Layer w0.7: U18.3@121.92,136.168 124.563,136.168 126.198,134.533 126.198,133.478 R94.1@126.238,133.438
NetR97_2: R97.2 U19.1 | length 2.2
  Top Layer w0.7: R97.2@117.094,108.751 117.126,108.783 119.221,108.783 U19.1@119.253,108.815
NetR98_1: R98.1 U19.3 | length 5.5
  Top Layer w0.7: U19.3@121.793,118.515 121.831,118.477 121.831,116.715 122.889,115.658 R98.1@125.095,115.658
NetR101_2: R101.2 U20.1 | length 2.4
  Top Layer w0.7: R101.2@116.84,95.289 116.871,95.257 119.222,95.257 U20.1@119.253,95.226
NetR102_1: R102.1 U20.3 | length 10.4
  Top Layer w0.7: U20.3@121.793,104.926 125.833,104.926 127.254,103.505 R102.1@127.254,99.148
SD_CLK: U1.6
SD_DAT: U1.8
SD_PG: U1.3
USBDM: P2.2 U1.23 | length 17
  Top Layer w0.22: P2.2@143.891,188.849 143.891,197.612 145.65,199.371 150.592,199.371 150.721,199.242 U1.23@150.721,198.574
USBDP: P2.3 U1.24 | length 15.3
  Top Layer w0.22: P2.3@146.431,188.849 146.431,189.195 146.078,189.549 146.078,189.583 144.78,190.881 144.78,197.485 145.869,198.574 U1.24@150.321,198.574
VBAT: C51.1 D3.2 U1.10 | length 4.9
  Top Layer w0.2: U1.10@153.726,195.569 154.824,195.569 155.25,195.143 D3.2@155.25,194.007 157.27,194.007 C51.1@157.321,193.956
VCM: C29.1 U1.32 | length 3
  Top Layer w0.2: C29.1@149.313,192.786 149.098,193.001 149.098,195.042 149.215,195.159 149.706,195.159 U1.32@149.716,195.169
Vin-P: C98.2 C99.2 L12.1 U2.3 | length 6.8
  Top Layer w0.4: C98.2@132.08,199.175 134.243,199.175 C99.2@134.366,199.052 134.112,198.798 L12.1@134.112,197.064 ; L12.1@133.787,196.488 133.787,196.457 134.138,196.107 U2.3@136,196.107
Vout: C74.2 C94.2 C95.2 C142.1 SB1.1 U2.1 | length 19.1
  Top Layer w0.4: C74.2@135.089,210.312 136.271,210.312 136.953,209.63 136.953,207.558 C142.1@136.993,207.518 136.953,207.478 136.953,204.874 139.389,202.438 139.389,201.19 C94.2@139.386,201.187 139,200.801 139,198.393 U2.1@139,196.107 140.743,196.107 140.743,195.953 140.843,195.853 SB1.1@140.843,195.699
VPWR: C44.1 D3.1 P2.1 SB1.2 U1.9 | length 37.3
  Top Layer w0.2: U1.9@153.726,195.169 153.726,191.333 154.202,190.857 D3.1@155.25,190.857 155.25,192.061 155.367,192.178 C44.1@156.972,192.178 ; C44.1@157.321,192.178 C44.1@156.972,192.178 ; v1(157.48,190.754) 157.48,191.778 157.08,192.178 C44.1@156.972,192.178
  Top Layer w0.4: SB1.2@140.843,194.599 140.843,192.532 141.351,192.024 P2.1@141.351,188.849
  Bottom Layer w0.2: P2.1@141.351,188.849 141.351,187.452 142.24,186.563 154.178,186.563 155.067,187.452 155.067,189.313 156.508,190.754 v1(157.48,190.754)
pads on no net: A2.1 K3.NC K4.NC L9.0 LD6.0 T1.0 U3.4 U3.7 U3.9 U3.10 U3.15 U3.17 U3.24 U3.25 U3.28 U3.29 U3.32 U3.33 U3.34 U3.35

## Polygon pours and split planes (outlines as drawn)
GND on Bottom Layer "NONET_L02_P003" (solid, remove dead copper, shelved, pour order 3): 8.509,42.037 8.509,212.852 169.926,212.852 169.926,42.037
GND on Top Layer "NONET_L01_P002" (solid, remove dead copper, shelved, pour order 2): 8.509,42.037 8.509,212.852 169.926,212.852 169.926,42.037

## Keep-outs
Keep-Out Layer:
  lines w0.2: 8.509,42.037 169.926,42.037 169.926,212.852 8.509,212.852 8.509,42.037 ; 139.281,205.867 154.281,205.867 154.281,212.852 139.281,212.852 139.281,205.867 ; 164.719,168.007 164.719,183.007 169.926,183.007 169.926,168.007 164.719,168.007

## Other copper
Top Layer:
  rectangle net GND: 154.281,204.978 157.099,207.264
  rectangle net GND: 158.184,205.867 169.926,207.31
  region net 24V_P: 70.231,115.189 68.326,115.189 68.326,105.791 70.231,105.791
  region net 24V_P: 58.166,91.821 58.166,93.726 49.276,93.726 49.276,91.821
  region net 24V_P: 108.839,91.821 108.839,93.726 99.568,93.726 99.568,91.821
  region net 24V_P: 91.44,91.948 91.44,93.853 66.294,93.853 66.294,91.948
  rectangle net 24V_P: 68.453,141.478 70.358,151.511
  rectangle net 24V_P: 68.326,123.317 70.231,133.35
  pour cut-out: 164.211,183.134 164.211,167.489 169.926,167.489 169.926,183.171
  pour cut-out: 42.799,76.876 42.799,62.23 120.65,62.23 120.65,77.375
  pour cut-out: 43.155,196.512 43.155,181.184 120.65,181.184 120.65,197.009
  pour cut-out: 169.926,212.852 154.281,212.852 154.281,207.264 169.962,207.264
  pour cut-out: 153.516,204.751 143.058,204.751 143.058,200.433 153.544,200.433
  pour cut-out: 42.282,174.18 27.352,174.18 27.352,91.44 42.813,91.44
Bottom Layer:
  region net GND: 147.382,160.289 147.382,155.313 152.662,155.313 152.662,160.289
  region net GND: 57.481,170.055 57.481,166.857 64.527,166.857 64.527,170.055
  region net GND: 91.898,170.055 91.898,166.857 98.944,166.857 98.944,170.055
  region net GND: 98.941,88.193 98.941,91.392 91.895,91.392 91.895,88.193
  region net GND: 65.695,88.193 65.695,91.392 58.649,91.392 58.649,88.193
  rectangle net GND: 64.71,115.901 67.908,122.947
  rectangle net GND: 64.71,134.06 68.229,141.106
  region net NetC38_2: 61.976,114.173 61.976,117.883 59.436,117.883 59.436,114.173
  region net NetC50_2: 61.722,120.523 61.722,125.095 59.309,125.095 59.309,120.523
  region net NetC166_2: 60.933,86.319 55.753,86.319 55.753,83.947 60.933,83.947
  region net NetC152_2: 68.553,86.446 63.6,86.446 63.6,84.287 68.553,84.287
  rectangle net NetC151_2: 54.229,171.999 59.463,174.158
  rectangle net NetC165_2: 62.103,172.212 67.056,174.371
  rectangle net GND: 154.281,204.978 157.099,207.264
  rectangle net GND: 158.184,205.867 169.926,207.31
  rectangle net GND: 156.103,172.212 162.052,178.43
  rectangle net GND: 150.171,194.964 153.271,198.174
  region net 24V_P: 109.22,91.821 109.22,93.726 49.276,93.726 49.276,91.821
  region net 24V_P: 109.601,164.211 109.601,166.497 48.641,166.497 48.641,164.211
  rectangle net 24V_P: 68.326,107.188 70.231,133.35
  pour cut-out: 164.211,183.134 164.211,167.489 169.926,167.489 169.926,183.171
  pour cut-out: 169.926,212.852 154.281,212.852 154.281,207.264 169.962,207.264

## Silkscreen, mask and mechanical layers (free items; w line width, h text height)
Top Overlay:
  text "5" at 38.978,50.433 h12
  text "V001000252304XT" at 37.719,47.389 h1.52

## Text inside footprints (layer, text, board x,y; h text height)
C14: Top Overlay "+" at 52.07,157.353 h4 r270
C23: Top Overlay "+" at 160.909,55.499 h4 r180
C27: Top Overlay "+" at 65.278,157.353 h4 r270
C28: Top Overlay "+" at 62.865,101.473 h4 r90
C53: Top Overlay "+" at 52.197,101.473 h4 r90
C57: Top Overlay "+" at 169.401,80.156 h4 r180
C86: Top Overlay "+" at 84.963,162.56 h4 r90
C93: Top Overlay "+" at 139.205,66.867 h1.52 r180
C103: Top Overlay "+" at 106.807,96.139 h4 r270
C138: Top Overlay "+" at 109.855,162.56 h4 r90
C141: Top Overlay "+" at 82.042,95.758 h4 r270
C147: Top Overlay "+" at 50.927,162.56 h4 r90
C150: Top Overlay "+" at 71.882,95.758 h4 r270
C167: Top Overlay "+" at 74.168,162.56 h4 r90
C170: Top Overlay "+" at 49.022,95.758 h4 r270